# Allegro board OSCILATOR2.brd
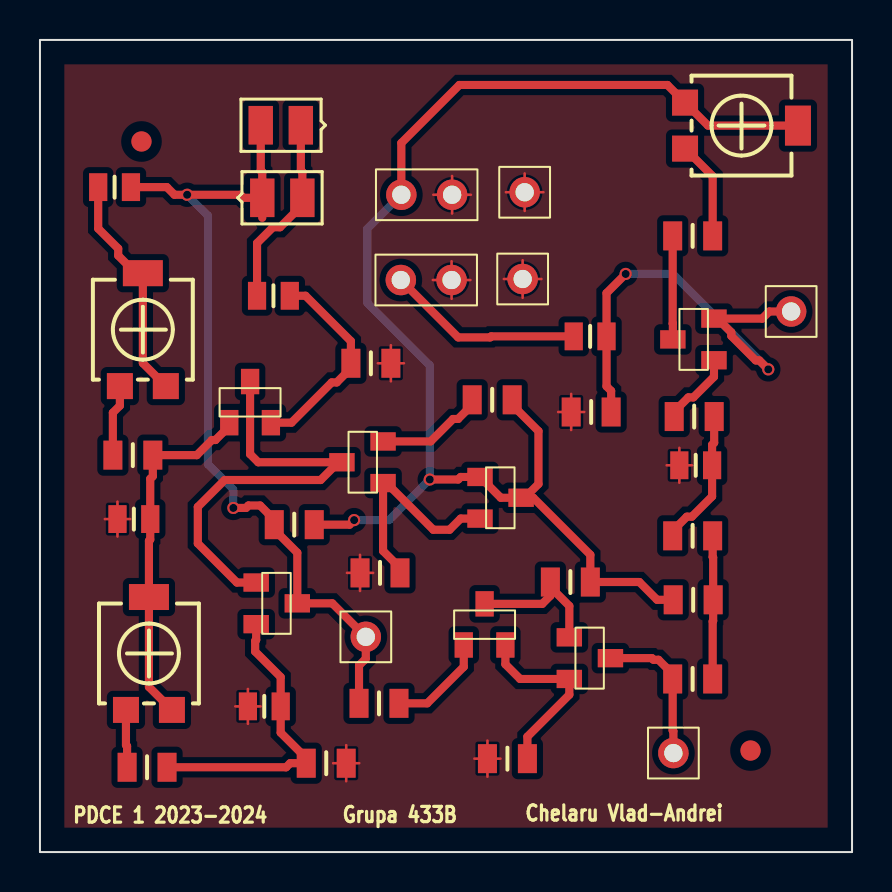
[diagram p0: board, top side]
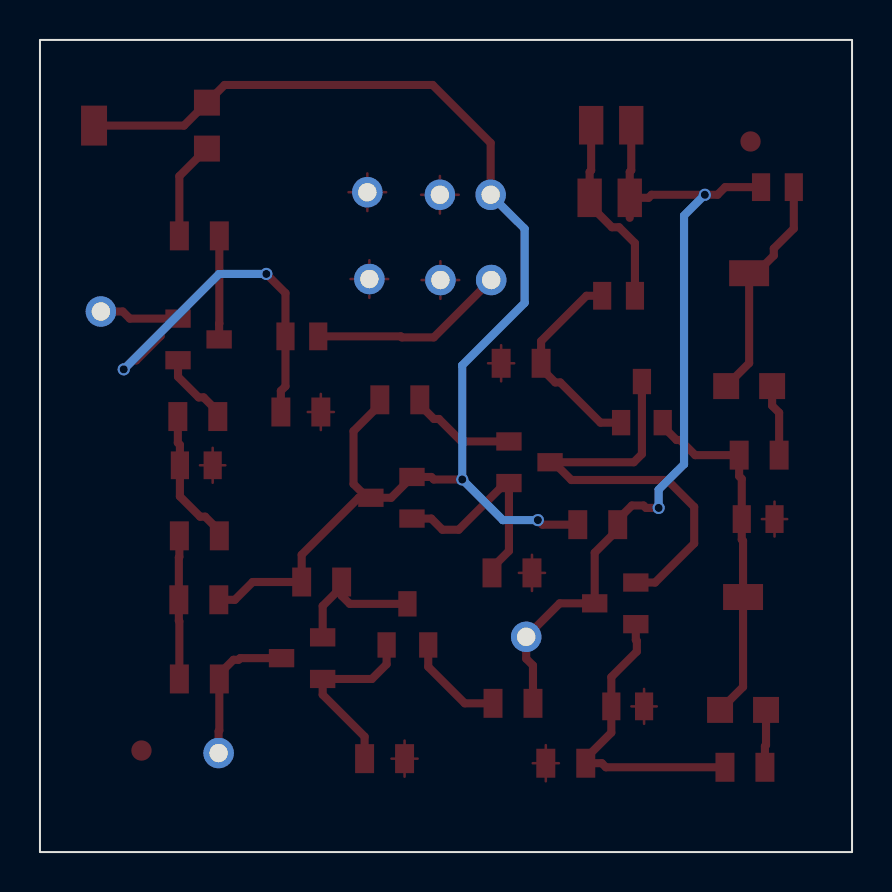
[diagram p1: board, bottom side, seen from below]

Outline 40.64 x 40.64 mm; copper layers: TOP, BOTTOM. Coordinates in mm from the lower left corner of the outline.
Outline path: rectangle 0,0 40.64,40.64

## Design rules (mm)
constraint set DEFAULT: min track width 0.127
nets with their own width: min track width 0.127; nets GND N94501 N94669 N94751 N94781 N95079 N95085 N95089

## Placement (name value [footprint] x y rotation side)
C1  220n  [CAPC2012X135N]  3.73 33.27 0 top
C2  220n  [CAPC2012X135N]  4.7 16.66 0 top
C3  4.7u  [CAPC2012X135N]  11.23 7.29 0 top
C4  4.7u  [CAPC2012X135N]  11.68 27.84 180 top
C5  470n  [CAPC2012X135N]  32.82 19.35 0 top
C6  1n  [CAPC2012X135N]  27.53 25.81 180 top
D1  D1N4148  [SMD0805]  11.13 32.74 0 top
D2  D1N4148  [SMD0805]  13.06 36.37 180 top
DZ  BZX84C2V7  [TO236AB]  22.02 18.77 180 top
J1  LOAD  [JUMPER2]  18.06 28.63 0 top
J2  VCC  [JUMPER2]  18.08 32.89 0 top
J3  GND  [JUMPER1]  24.16 28.68 0 top
J4  GND  [JUMPER1]  24.26 33.02 0 top
J5  SIN  [JUMPER1]  16.31 10.77 0 top
J6  SQUARE  [JUMPER1]  31.7 4.95 0 top
J7  TRIANGLE  [JUMPER1]  37.59 27.05 0 top
NOREF  -  []  0 0 0 top
NOREF#2  -  []  40.64 0 90 top
NOREF#3  -  [unnamed#2]  35.56 5.08 0 top
NOREF#4  -  [unnamed#2]  5.08 35.56 0 top
POT1  10k  [TS53YL]  6.3 23.32 270 top
POT2  10k  [TS53YL]  6.6 7.11 270 top
POT3  10k  [TS53YL]  32.28 35.2 180 top
Q1  BC856B  [TO236AA]  17.17 18.47 0 top
Q2  BC846B  [TO236AA]  9.47 21.49 270 top
Q3  BC846B  [TO236AA]  10.82 13.49 180 top
Q4  BC846B  [TO236AA]  21.21 10.36 270 top
Q5  BC846B  [TO236AA]  26.49 10.74 180 top
Q6  BC856B  [TO236AA]  33.73 24.61 0 top
R1  100  [RES2012X50N_0805]  4.65 19.86 180 top
R2  100  [RES2012X50N_0805]  5.36 4.24 180 top
R3  3.3k  [RES2012X50N_0805]  16.56 24.46 0 top
R4  220  [RES2012X50N_0805]  14.33 4.45 180 top
R5  2.2k  [RES2012X50N_0805]  17.02 13.97 0 top
R6  2k  [RES2012X50N_0805]  22.63 22.63 0 top
R7  220  [RES2012X50N_0805]  12.73 16.38 0 top
R8  150k  [RES2012X50N_0805]  16.97 7.44 0 top
R9  1k  [RES2012X50N_0805]  26.54 13.51 0 top
R10  4.7k  [RES2012X50N_0805]  32.66 8.66 0 top
R11  1k  [RES2012X50N_0805]  32.69 12.62 180 top
R12  51  [RES2012X50N_0805]  23.39 4.67 0 top
R13  4.7k  [RES2012X50N_0805]  32.66 15.82 0 top
R14  22k  [RES2012X50N_0805]  32.74 21.79 0 top
R15  1k  [RES2012X50N_0805]  32.66 30.84 0 top
R16  100k  [RES2012X50N_0805]  27.58 22.02 0 top

## Library data of the parts
C1-C6 = C
D1 = D1N4148_3
D2 = D1N4148_2
DZ = BZX84C2V7_1
J1 J2 = CON2: User Part Number: ***
J3-J7 = CON1: User Part Number: ***
POT1-POT3 = POT
Q1 Q6 = BC856B
Q2-Q5 = BC846B
R1-R16 = R

## Footprints (pads in the part's own frame, mm; a bottom-side part is the same pattern mirrored in y, then rotated)
CAPC2012X135N
  rect 0.91x1.39 smd: 1(-0.82,0) 2(0.82,0)
JUMPER1
  round 1.524 hole 0.914: 1(0,0)
JUMPER2
  round 1.524 hole 0.914: 1(0,0) 2(2.54,0)
RES2012X50N_0805
  rect 0.95x1.45 smd: 1(-1,0) 2(1,0)
SMD0805
  rect 1.219x1.93 smd: A(2.007,0) C(0,0)
TO236AA
  rect 1.27x0.914 smd: 1(0,0) 2(0,2.083) 3(-2.057,1.041)
TO236AB
  rect 1.27x0.914 smd: 1(0,0) 2(0,2.083) 3(-2.057,1.041)
TS53YL
  rect 1.3x1.3 smd: 1(0,0) 3(0,-2.3)
  rect 1.3x2 smd: 2(-5.65,-1.15)
unnamed#2
  round 1.016 smd: (0,0)

## Nets
GND: C2.1 C3.1 C5.1 J1.2 J2.2 J3.1 J4.1 R3.2 R4.1 R5.1 R12.1 R16.1
N94313: DZ.1 DZ.3(PLUS) J2.1 POT3.2(T) POT3.3 R6.2 R7.2 R9.2 R11.2
N94383: C1.2 D1.C D2.A J5.1 Q3.3 R7.1 R8.1
N94397: POT3.1 R15.2
N94495: Q6.3 R15.1
N94501: C1.1 POT1.1 POT1.2(T)
N94547: R10.2 R11.1 R13.2
N94637: C5.2 R13.1 R14.2
N94669: Q4.3 Q5.1 R9.1
N94751: Q1.2(E) R6.1
N94757: C6.1 J7.1 Q6.2(E) R16.2
N94781: POT1.3 R1.2
N94831: J6.1 Q5.3 R10.1
N94841: C6.2 J1.1
N94865: C4.2 D1.A D2.C
N95013: DZ.2 Q1.1 R5.2
N95079: Q4.1 R8.2
N95085: Q4.2(E) Q5.2(E) R12.2
N95089: Q1.3 Q2.3 Q3.1
N95235: C3.2 Q3.2(E) R2.1 R4.2
N95241: C2.2 POT2.1 POT2.2(T) Q2.1 R1.1
N95307: C4.1 Q2.2(E) R3.1
N95407: POT2.3 R2.2
N945811: Q6.1 R14.1

## Via types
v1: diameter 0.61, hole 0.406, TOP to BOTTOM, 6 vias

## Routing (per net, layer and track width the routed paths; a pad name or vN(x,y) marks a point on that pad's centre or on a via; arc(x,y) is an arc through that point)
GND: length 39.7
  TOP w0.127: 32,18.48 C5.1 ; C5.1 32,20.23 ; C5.1 32.63,19.35 ; C5.1 31.36,19.35 ; R4.1 15.98,4.45 ; R4.1 14.67,4.45 ; R4.1 15.33,3.54 ; R4.1 15.33,5.35 ; 25.93,22.02 R16.1 ; R16.1 27.24,22.02 ; R16.1 26.58,22.93 ; R16.1 26.58,21.12 ; 19.66,28.63 J1.2 ; J1.2 20.6,29.57 ; J1.2 21.54,28.63 ; J1.2 20.6,27.69 ; 3.88,15.79 C2.1 ; C2.1 3.25,16.66 ; C2.1 3.88,17.54 ; C2.1 4.51,16.66 ; R5.1 16.67,13.97 ; R5.1 15.36,13.97 ; R5.1 16.02,14.87 ; R5.1 16.02,13.07 ; 9.77,7.29 C3.1 ; C3.1 10.41,8.16 ; C3.1 11.04,7.29 ; C3.1 10.41,6.42 ; 23.32,33.02 J4.1 ; J4.1 24.26,33.96 ; J4.1 25.2,33.02 ; J4.1 24.26,32.08 ; 20.62,31.95 J2.2 ; J2.2 20.62,33.83 ; J2.2 21.57,32.89 ; J2.2 19.68,32.89 ; 23.22,28.68 J3.1 ; J3.1 25.1,28.68 ; J3.1 24.16,27.74 ; J3.1 24.16,29.62 ; 22.39,3.77 R12.1 ; R12.1 21.74,4.67 ; R12.1 23.05,4.67 ; R12.1 22.39,5.58 ; 17.56,23.56 R3.2 ; R3.2 16.91,24.46 ; R3.2 17.56,25.36 ; R3.2 18.21,24.46
N94313: length 68.8
  TOP w0.406: POT3.2 33.43,36.35 POT3.3 31.4,38.39 20.99,38.39 18.08,35.48 J2.1 ; v1(15.72,16.61) 15.49,16.38 R7.2 ; R11.2 30.88,12.62 30,13.51 R9.2 27.54,14.88 24.69,17.73 24.26,17.73 ; 24.26,17.73 24.95,18.42 24.95,21.06 23.63,22.38 R6.2 ; 24.26,17.73 DZ.3 23.06,17.73 DZ.1 21.06,18.77 20.93,18.64 v1(19.51,18.64)
  BOTTOM w0.406: v1(15.72,16.61) 17.48,16.61 v1(19.51,18.64) 19.51,24.36 16.38,27.48 16.38,31.19 J2.1
N94383: length 42.7
  TOP w0.406: v1(9.68,17.22) 10.31,17.22 10.43,17.34 11.02,17.34 11.73,16.63 R7.1 11.73,16.13 12.88,14.98 Q3.3 14.63,12.45 J5.1 16.31,9.68 15.97,9.34 R8.1 ; D1.C 11.13,34.04 11.05,34.11 D2.A ; D1.C 10.19,32.74 10.03,32.89 v1(7.37,32.89) 6.73,32.89 6.35,33.27 C1.2 ; D1.C 11.13,31.74
  BOTTOM w0.406: v1(9.68,17.22) 9.68,18.14 8.41,19.41 8.41,31.85 v1(7.37,32.89)
N94397: length 4.9
  TOP w0.406: POT3.1 33.66,33.82 R15.2
N94495: length 5.2
  TOP w0.406: Q6.3 31.67,26.44 31.66,26.45 R15.1
N94501: length 11.6
  TOP w0.406: C1.1 2.91,31.2 3.92,30.2 3.92,29.85 4.8,28.97 POT1.2 5.15,24.47 POT1.1
N94547: length 7.2
  TOP w0.406: R10.2 33.66,11.54 33.69,11.57 R11.1 33.69,14.74 33.66,14.77 R13.2
N94637: length 7
  TOP w0.406: R13.1 31.66,16.07 32.37,16.78 32.62,16.78 33.64,17.8 C5.2 33.64,20.38 33.74,20.48 R14.2
N94669: length 7.1
  TOP w0.406: Q5.1 26.49,12.31 25.54,13.26 ; Q4.3 25.14,12.42 25.54,12.83 25.54,13.26 ; 25.54,13.26 R9.1
N94751: length 5.5
  TOP w0.406: R6.1 21.63,22.38 20.92,21.67 20.67,21.67 19.55,20.55 Q1.2
N94757: length 24.2
  TOP w0.406: 33.91,26.7 36.14,26.7 36.5,27.05 J7.1 ; 33.91,26.7 34.6,26 34.6,25.83 35.82,24.6 36,24.6 v1(36.45,24.16) ; 33.91,26.7 Q6.2 ; v1(29.31,28.93) 28.35,27.97 C6.1 28.35,23.31 28.58,23.08 R16.2
  BOTTOM w0.406: v1(36.45,24.16) 31.67,28.93 v1(29.31,28.93)
N94781: length 3.6
  TOP w0.406: R1.2 3.65,21.99 4,22.34 POT1.3
N94831: length 7.4
  TOP w0.406: J6.1 31.7,6.05 31.66,6.08 R10.1 31.66,8.91 30.96,9.62 30.71,9.62 30.62,9.7 Q5.3
N94841: length 9.9
  TOP w0.406: C6.2 22.58,25.81 22.53,25.76 20.93,25.76 J1.1
N94865: length 9.7
  TOP w0.406: C4.2 10.86,30.47 11.66,31.27 12.01,31.27 13.13,32.38 D1.A 13.13,34.04 13.06,34.11 D2.C
N95013: length 10.9
  TOP w0.406: DZ.2 21.06,16.69 20.5,16.13 19.68,16.13 17.35,18.47 Q1.1 17.17,15.07 18.02,14.22 R5.2
N95079: length 5.1
  TOP w0.406: R8.2 19.38,7.44 21.21,9.27 Q4.1
N95085: length 9.3
  TOP w0.406: Q4.2 23.29,9.4 24.03,8.66 Q5.2 26.49,7.87 24.39,5.78 R12.2
N95089: length 21.9
  TOP w0.406: 14.94,19.51 14.05,18.62 9.25,18.62 7.9,17.27 7.9,15.44 9.86,13.49 Q3.1 ; 14.94,19.51 15.11,19.51 ; 14.94,19.51 10.92,19.51 10.52,19.91 Q2.3
N95235: length 15.1
  TOP w0.406: R2.1 12.32,4.24 12.52,4.45 R4.2 13.33,4.7 12.05,5.97 C3.2 12.05,8.76 10.77,10.03 10.77,10.57 10.82,10.62 Q3.2
N95241: length 17.9
  TOP w0.406: Q2.1 9.47,21.31 8.78,20.62 8.61,20.62 7.85,19.86 R1.1 5.65,18.81 5.52,18.68 C2.2 5.52,15.64 5.45,15.57 POT2.2 5.45,8.26 POT2.1
N95307: length 10.5
  TOP w0.406: Q2.2 12.59,21.49 14.6,23.5 14.85,23.5 15.56,24.21 R3.1 15.56,25.57 13.29,27.84 C4.1
N95407: length 2.9
  TOP w0.406: POT2.3 4.3,5.35 4.36,5.3 R2.2
N945811: length 3.8
  TOP w0.406: R14.1 31.74,22.04 32.45,22.75 32.7,22.75 33.73,23.78 Q6.1

## Copper pours and planes (outline as drawn; the poured copper is in the pictures)
GND on TOP: 1.22,1.22 1.22,39.42 39.42,39.42 39.42,1.22

## Text on the board
Ref Des/Silkscreen Top: PDCE 1 2023-2024 | Grupa 433B | Chelaru Vlad-Andrei
XSECTION_CHART: *  SURFACE - 0 MIL | L1 TOP CONDUCTOR - 0.0007 MIL | *  DIELECTRIC - 29.999 MIL | L2 BOTTOM CONDUCTOR - 0.0007 MIL | DESIGN CROSS SECTION CHART | ___________________________ | TOTAL THICKNESS 60 MIL | 1-2
DISPLAY_TOP: FIGURE | FINISHED_SIZE | 16.0 | 36.0 | DRILL CHART: TOP to BOTTOM | ALL UNITS ARE IN MILS | PLATED | QTY | 6 | 9
